# Altium PCB MainPCBRev2.PcbDoc
Units mil, origin at the board's own origin, x right, y up, seen from the top; angles counter-clockwise.
Board outline 3935 x 2755.91 mil, 2 copper layers (Top Layer, Bottom Layer), stack 61.811 mil thick; 29 components, 28 nets, 150 pads, 18 vias.
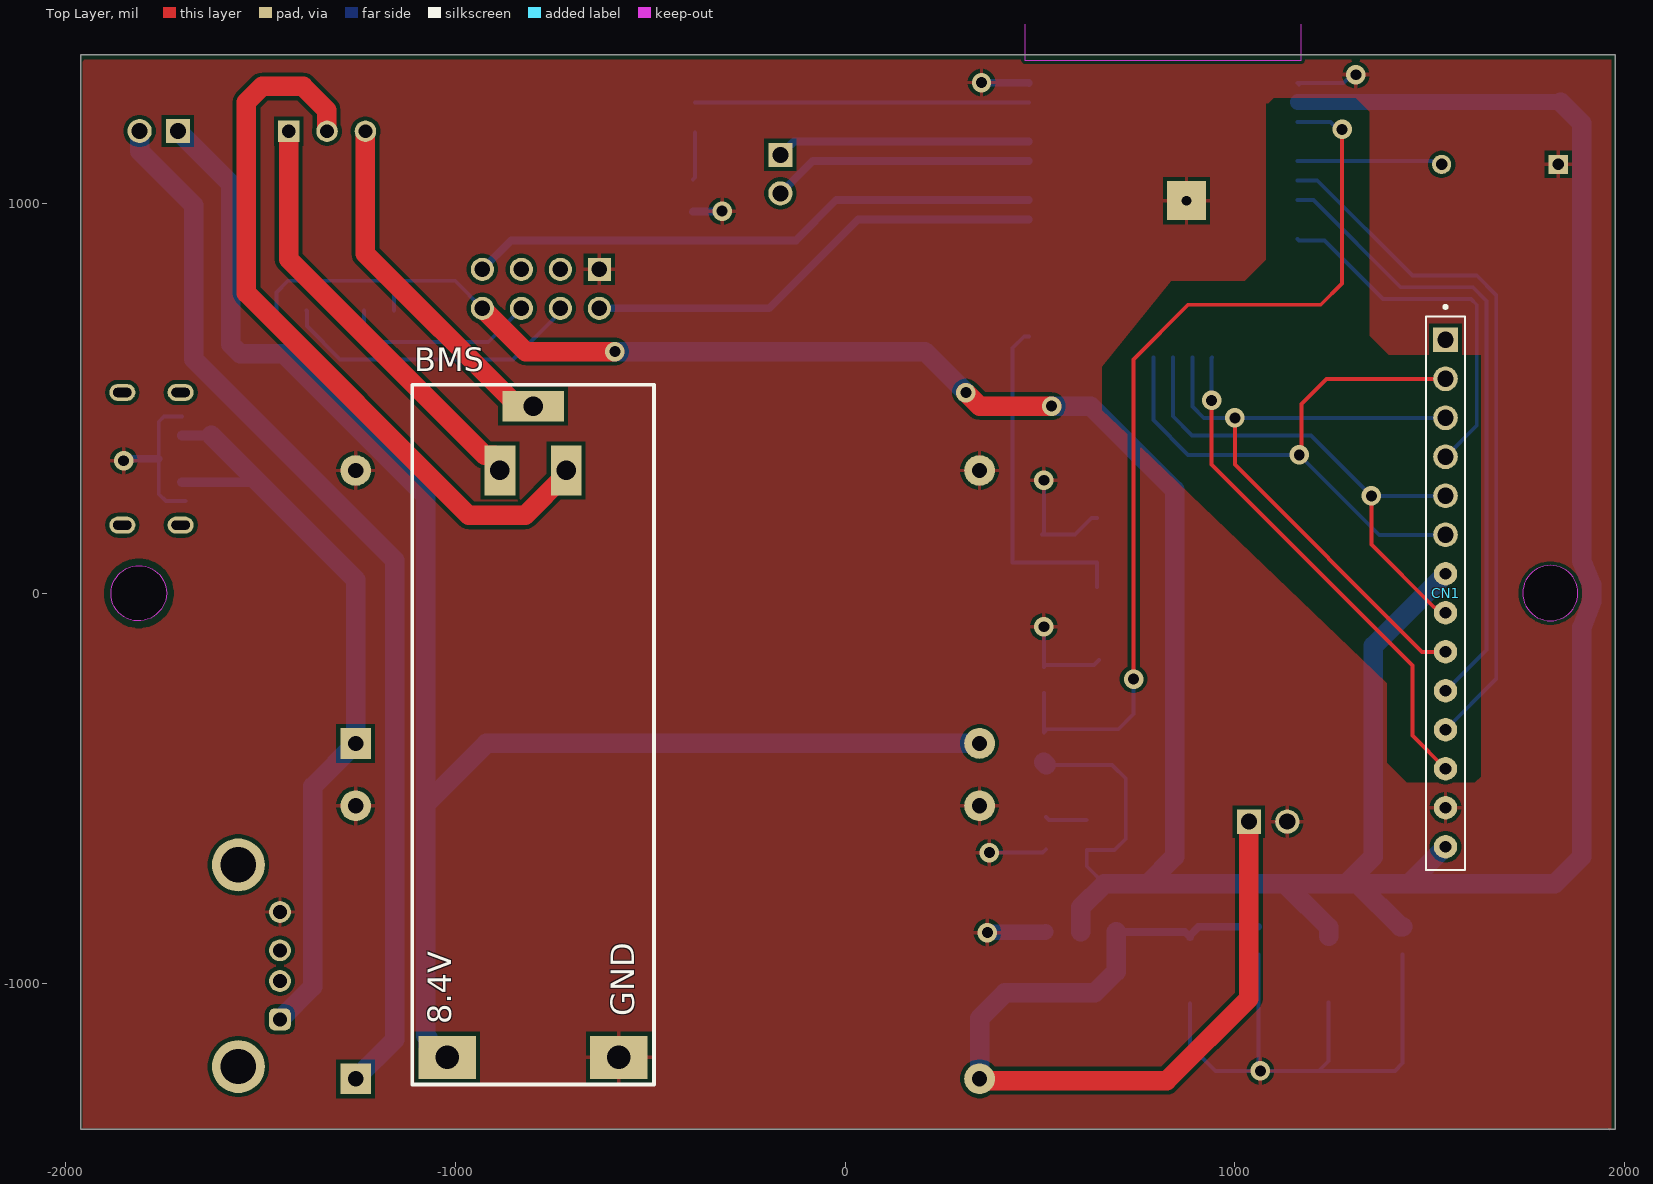
[diagram p0: Top Layer view]
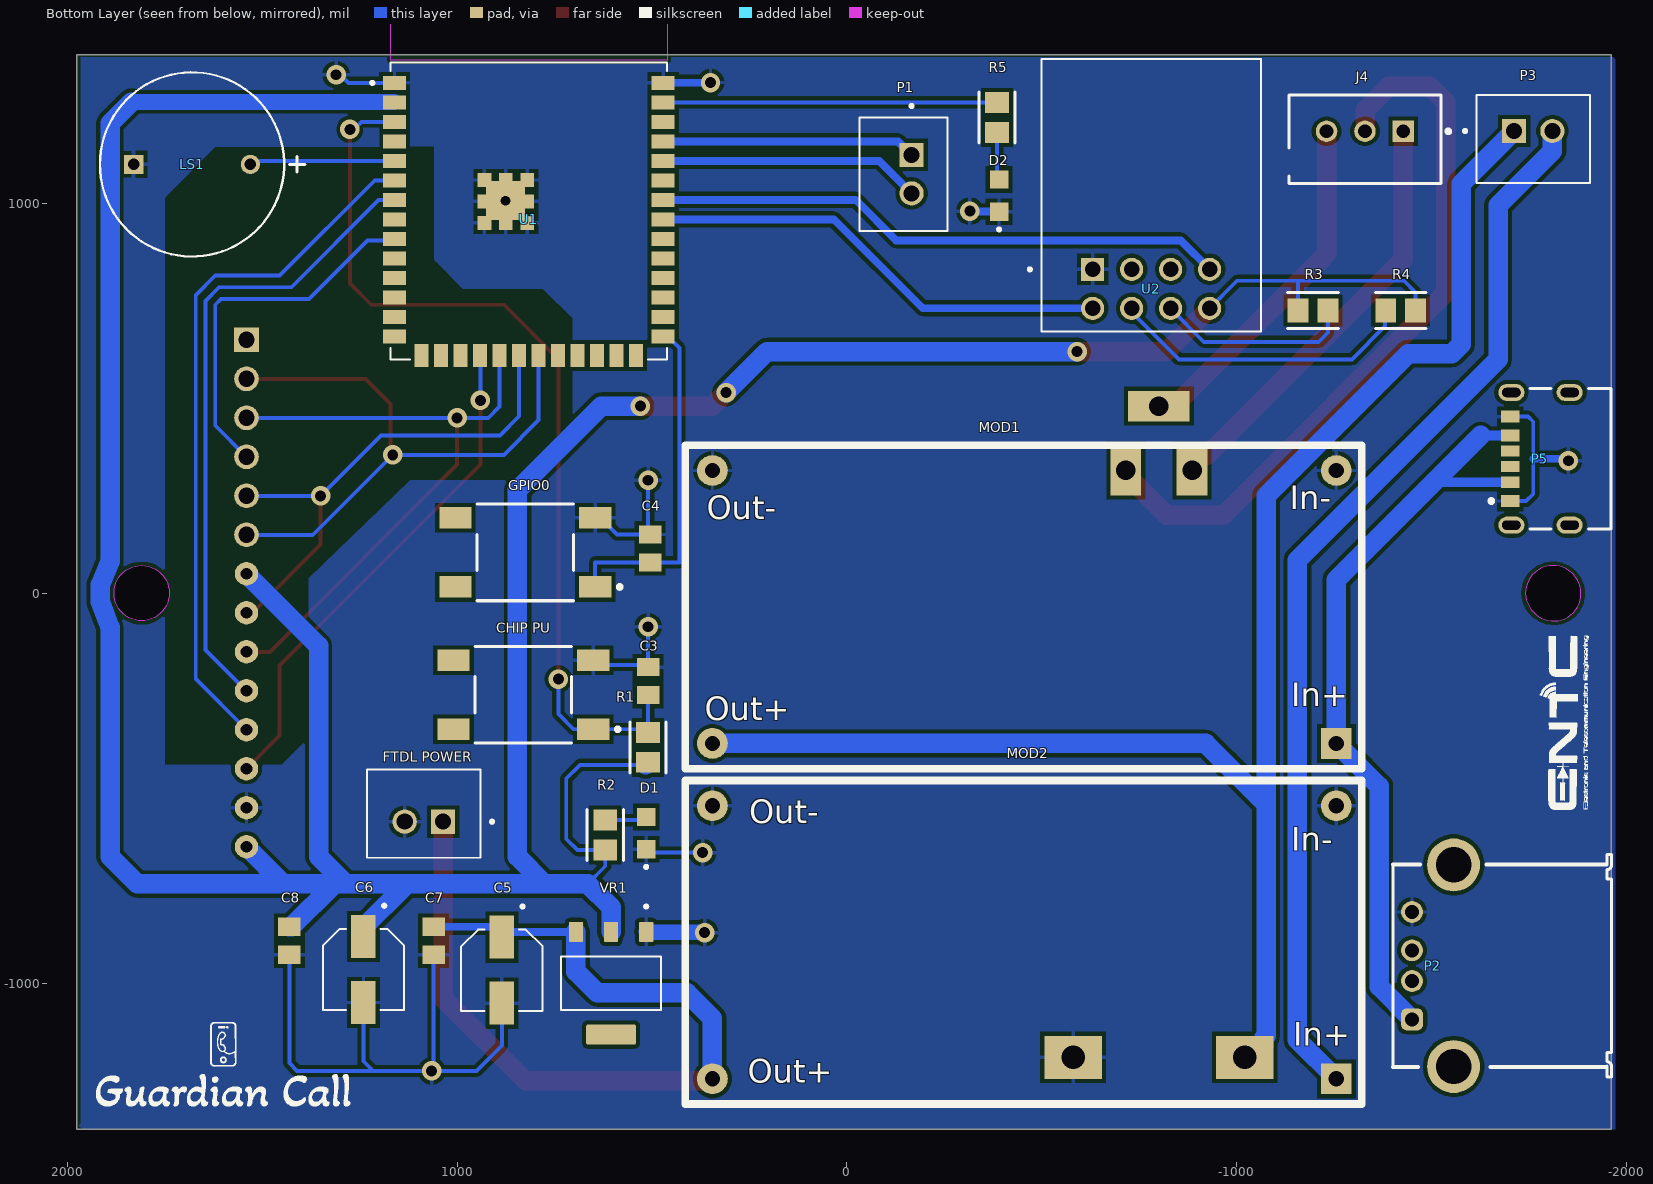
[diagram p1: Bottom Layer view, seen from below]

## Layer stack, top to bottom
Top Solder: solder mask 0.3937, Solder Resist, Dk 3.5
Top Layer: signal copper 1.378
Dielectric 1: dielectric 59.0551, FR-4, Dk 4.8
Bottom Layer: signal copper 1.378
Bottom Solder: solder mask 0.3937, Solder Resist, Dk 3.5

## Board outline
-1960,-1375 -1960,1380.91 1975,1380.91 1975,-1375
cut-out: 1737.96,0.5 ccw(c1808.83,0.5) 1808.83,-70.37 ccw(c1808.83,0.5) 1879.69,0.5 ccw(c1808.83,0.5) 1808.83,71.36 ccw(c1808.83,0.5)
cut-out: -1815.05,-70.91 cw(c-1813.1,-1.96) -1882.04,0 cw(c-1811.02,0) -1811.02,71.02 cw(c-1811.02,0) -1740,0 cw(c-1812.98,2.07)

## Design rules (kind name [scope] priority, off if disabled: settings)
Clearance Clearance_1 [All] p1: gap=10 ignorepadtopadclearanceinfootprint=FALSE except(0: Arc-Hole Track-Hole SMDPad-Hole THPad-Hole Via-Hole Fill-Hole Poly-Hole Region-Hole Text-Hole Hole-Hole)
Clearance [All] p2: gap=10 ignorepadtopadclearanceinfootprint=FALSE ismatrix=TRUE
MinimumSolderMaskSliver [All] p1: minsoldermaskwidth=3.94
PolygonConnect [All] p1: connectstyle=Relief reliefconductorwidth=10 reliefentries=4 polygonreliefangle="90 Angle" airgapwidth=10
RoutingCorners RoutingCornerStyle_1 [All] p1: cornerstyle=45-Degree minsetback=100 maxsetback=100
RoutingCorners [All] p2: cornerstyle=45-Degree minsetback=100 maxsetback=100
RoutingVias [All] p1: holewidth=28 width=50 viastyle="Through Hole" minholewidth=28 minwidth=50 maxholewidth=28 maxwidth=50
SilkToSolderMaskClearance [IsPad] p1: minsilkscreentomaskgap=0 clearancetoexposedcopper=TRUE
SolderMaskExpansion [All] p1: expansion=4 istentingtop=FALSE
Width MaxMinWidth1 [All] p1: maxlimit=50 minlimit=10 preferedwidth=20 minimp=50.000000 maximp=50.000000 favimp=50.000000
Width [All] p2: maxlimit=10 minlimit=10 preferedwidth=10
27 further rules are at their usual default settings.

## Components (designator, comment, footprint, x,y, rotation, side; value= is the part's Value field where it differs from the comment)
BMS "2S BMS" "2S BMS" -800,-365 r90 top
C3 "0.1uF 50V X8L 10%" CAPC2012X145N 510,-225 r270 bottom
C4 "0.1uF 50V X8L 10%" CAPC2012X145N 505,115 r270 bottom
C5 "10uF/50V (20%)" CAP_EEE1EA100SR 885,-966.54 r270 bottom
C6 "10uF/50V (20%)" CAP_EEE1EA100SR 1240,-964.65 r270 bottom
C7 "0.1uF 50V X8L 10%" CAPC2012X145N 1060,-890.83 r90 bottom
C8 "0.1uF 50V X8L 10%" CAPC2012X145N 1430,-890.83 r90 bottom
"CHIP PU" "1571527-2" FP-1571527-2-MFG 830,-260 r270 bottom (schematic designator SW1)
CN1 "Display Headers" "Display Without Cutouts" -20,0 r270 top locked
D1 "LTST-C171TBKT" DIOC200X125X110 515,-615 r90 bottom
D2 "LTST-C171TBKT" DIOC200X125X110 -390,1020 r90 bottom
"FTDL POWER" "FTDL POWER" JST_B2B-XH-A(LF)(SN) 1085,-565 r180 bottom (schematic designator P4)
GPIO0 "1571527-2" FP-1571527-2-MFG 825,105 r270 bottom (schematic designator SW2)
J4 "B3B-XH-AM(LF)(SN)(P)" FP-B3B-XH-AM_LF_SN_P-MFG -1328.43,1164.33 r0 bottom
LS1 "MCKPX-G1203A-K4056" "FP-MCKPX-G1203A-K4056-MFG - duplicate" 1679.61,1100 r180 bottom
MOD1 "DC-DC Boost converter XL6009" "DC-DC boost" -455,-35 r0 bottom
MOD2 "DC-DC Buck converter MP1584 or XL4015" "DC-DC boost" -455,-895 r0 bottom
P1 "TX_RX Header" JST_B2B-XH-A(LF)(SN) -145,1075 r90 bottom
P2 "61400416021" 61400416021 -1685,-955 r90 bottom
P3 "Power Button Connector B2B-XH-A(LF)(SN)" JST_B2B-XH-A(LF)(SN) -1760,1165 r0 bottom
P5 "217175-0001" FP-217175-0001-MFG -1820,345 r90 bottom
R1 "RG2012N-103-B-T5" FP-RG2012-IPC_A 510,-395 r270 bottom
R2 "10kΩ, 0.1%,150V" FP-RG2012-IPC_A 620,-620 r90 bottom
R3 "10kΩ, 0.1%,150V" FP-RG2012-IPC_A -1195,725 r0 bottom
R4 "10kΩ, 0.1%,150V" FP-RG2012-IPC_A -1420,725 r180 bottom
R5 "10kΩ, 0.1%,150V" FP-RG2012-IPC_A -385,1220 r270 bottom
U1 "ESP32-S3_WROOM-1 (N16R8)" XCVR_ESP32-S3-WROOM-1-N16R2 815.83,1101.85 r180 bottom
U2 "2x4 ESP01s" MODULE_ESP-01 -780,1160 r180 bottom
VR1 "AMS1117-3.3" SOT229P700X180-4N 605,-1000 r270 bottom

## Footprints (in the part's own frame and the unit in brackets; to place one, negate y for a bottom-side part, rotate by r counter-clockwise, add the part's x,y. Pads: shape width x height; smd on the part's side, far side on the other; paste and mask are expansions set on the pad)
"2S BMS" [mil]
  rect 110.1x147 hole 60 mask-99999: 1(-825,220)
  rect 110.11x147.48 hole 60 mask-99999: 2(-825,-220)
  rect 127.48x78.74 hole 50 mask-99999: 3(680,85) 4(680,-85)
  rect 78.74x157.48 hole 50 mask-99999: 5(845,0)
  silkscreen extent -895,-310 900,310
61400416021 [mm] "USB 2.0 Type A Horizontal"
  rrect50% 1.42x1.42 hole 0.92: 1(-3.5,5.99)
  round 1.42 hole 0.92: 2(-1,5.99) 3(1,5.99) 4(3.5,5.99)
  round 3.45 hole 2.3: Shell(-6.57,3.28) Shell(6.57,3.28)
  silkscreen extent -7.25,-7 7.25,7.24, body extent -8,-7 8,7, height 7.63
CAP_EEE1EA100SR [mm]
  rect 2.8x1.6 smd: 1(-2.15,0) 2(2.15,0)
  silkscreen extent -4.25,-2.65 2.65,2.65, body extent -3,-2.65 3,2.65, height 5.8
CAPC2012X145N [mm]
  rect 1.19x1.47 smd: 1(-0.91,0) 2(0.91,0)
  body extent -1,-0.63 1,0.63, height 1.45
"DC-DC boost" [mm]
  rect 2x2 hole 1: 1(-20.32,8.89)
  round 2 hole 1: 2(-20.32,-8.89) 3(20.32,8.89) 4(20.32,-8.89)
  silkscreen extent -21.97,-10.54 22.1,10.54
DIOC200X125X110 [mm]
  rect 1.2x1.2 smd: A(1.05,0) C(-1.05,0)
  silkscreen extent -2.3,-0.1 -2.1,0.1, body extent -1,-0.63 1,0.63, height 1.1
"Display Without Cutouts" [mil]
  rect 63.19x63.19 / inner round 63.19 / far side rect 63.19x63.19 hole 42.13: 1(-650,1560)
  round 63.19 hole 42.13: 2(-550,1560) 3(-450,1560) 4(-350,1560) 5(-250,1560) 6(-150,1560)
  round 60 hole 30: 7(-50,1560) 8(50,1560) 9(150,1560) 10(250,1560) 11(350,1560) 12(450,1560) 13(550,1560) 14(650,1560)
  silkscreen extent -739,1510 710,1610, body extent -984,-1610 985,1611, height 650
FP-217175-0001-MFG [mm]
  rrect100% 1.1x1.7 hole 0.6 slot 1.2 at 90 deg paste-2539.97 mask+0: 1(-4.32,2.95) 2(4.32,2.95) 3(-4.32,-0.85) 4(4.32,-0.85)
  rect 0.7x1.2 smd paste+0 mask+0: A5(-0.5,3.03) B5(0.5,3.03)
  rect 0.76x1.2 smd paste+0 mask+0: A9(1.52,3.03) B9(-1.52,3.03)
  rect 0.8x1.2 smd paste+0 mask+0: A12(2.75,3.03) B12(-2.75,3.03)
  silkscreen extent -4.57,-3.55 4.57,4.38, body extent -4.47,-3.45 4.47,3.45, height 3.46
FP-1571527-2-MFG [mm]
  rect 1.4x2.1 smd paste+0 mask+0: 1(-2.25,4.55) 2(-2.25,-4.55) 3(2.25,-4.55) 4(2.25,4.55)
  silkscreen extent -3.15,-3.15 3.15,6.27, body extent -3,-5 3,5, height 4.54
FP-B3B-XH-AM_LF_SN_P-MFG [mm]
  rect 1.4x1.4 hole 0.9 paste-2539.97 mask+0: 1(-2.5,-0.525)
  round 1.4 hole 0.9 paste-2539.97 mask+0: 2(0,-0.525) 3(2.5,-0.525)
  silkscreen extent -5.55,-2.88 4.95,2.88, body extent -4.95,-2.88 4.95,2.88, height 7
"FP-MCKPX-G1203A-K4056-MFG - duplicate" [mm]
  round 1.25 hole 0.75 paste-2539.97 mask+0: +(3.8,0)
  rect 1.25x1.25 hole 0.75 paste-2539.97 mask+0: -(-3.8,0)
  silkscreen extent -6,-6 7.35,6, body extent -6,-6 6.38,6, height 9.5
FP-RG2012-IPC_A [mil]
  rect 53.34x61.27 smd paste+0 mask+0: 1(-38.41,0) 2(38.41,0)
  silkscreen extent -65,-46 65,46, body extent -39,-25 39,25, height 20
JST_B2B-XH-A(LF)(SN) [mm]
  rect 1.575x1.575 / inner round 1.575 / far side rect 1.575x1.575 hole 1.05: 1(1.25,-0.525)
  round 1.575 hole 1.05: 2(-1.25,-0.525)
  silkscreen extent -3.7,-2.88 4.54,2.88, body extent -3.7,-2.88 3.7,2.88, height 7
MODULE_ESP-01 [mm]
  rect 1.508x1.508 / inner round 1.508 / far side rect 1.508x1.508 hole 1: 1(-3.81,-8.36)
  round 1.508 hole 1: 2(-1.27,-8.36) 3(1.27,-8.36) 4(3.81,-8.36) 5(-3.81,-10.9) 6(-1.27,-10.9) 7(1.27,-10.9) 8(3.81,-10.9)
  silkscreen extent -8,-12.4 7.15,5.33, body extent -7.2,-12.35 7.2,12.35, height 6.5
SOT229P700X180-4N [mm]
  rrect15% 1.31x0.93 smd: 1(-3.345,2.29) 2(-3.345,0) 3(-3.345,-2.29)
  rrect15% 1.31x3.24 smd: 4(3.345,0)
  silkscreen extent -5.1,-3.25 1.75,3.25, body extent -3.5,-3.25 3.5,3.25, height 1.8
XCVR_ESP32-S3-WROOM-1-N16R2 [mm]
  rect 1.5x0.9 smd: 1(-8.75,5.26) 2(-8.75,3.99) 3(-8.75,2.72) 4(-8.75,1.45) 5(-8.75,0.18) 6(-8.75,-1.09) 7(-8.75,-2.36) 8(-8.75,-3.63) 9(-8.75,-4.9) 10(-8.75,-6.17) 11(-8.75,-7.44) 12(-8.75,-8.71) 13(-8.75,-9.98) 14(-8.75,-11.25) 27(8.75,-11.25) 28(8.75,-9.98) 29(8.75,-8.71) 30(8.75,-7.44) 31(8.75,-6.17) 32(8.75,-4.9) 33(8.75,-3.63) 34(8.75,-2.36) 35(8.75,-1.09) 36(8.75,0.18) 37(8.75,1.45) 38(8.75,2.72) 39(8.75,3.99) 40(8.75,5.26)
  rect 0.9x1.5 smd: 15(-6.985,-12.5) 16(-5.715,-12.5) 17(-4.445,-12.5) 18(-3.175,-12.5) 19(-1.905,-12.5) 20(-0.635,-12.5) 21(0.635,-12.5) 22(1.905,-12.5) 23(3.175,-12.5) 24(4.445,-12.5) 25(5.715,-12.5) 26(6.985,-12.5)
  rect 0.9x0.9 smd: 41(-2.9,-3.86) 41(-2.9,-2.46) 41(-2.9,-1.06) 41(-1.5,-3.86) 41(-1.5,-2.46) 41(-1.5,-1.06) 41(-0.1,-3.86) 41(-0.1,-2.46) 41(-0.1,-1.06)
  rect 2.54x2.54 hole 0.635: 41(-1.524,-2.413)
  Keep-Out Layer region: 9,6.75 -9,6.75 -9,12.75 9,12.75
  Keep-Out Layer region: 9,6.75 -9,6.75 -9,12.75 9,12.75
  silkscreen extent -10.3,-12.75 9,6.6, body extent -9,-12.88 9,12.62, height 3.25

## Part data
C3 C4 C7 C8: library part "0.1uF 50GCJ21BL81H104KA01LV X8L 10%", "Cap Ceramic 0.1uF 50V X8L 10% Pad SMD 0805 Soft Termination 150C Automotive T/R", Package="2012 Murata", Check_prices=https://www.snapeda.com/parts/GCJ21BL81H104KA01L/Murata+Electronics+North+America/view-part/?ref=eda, MF=Murata, MP=GCJ21BL81H104KA01L, SnapEDA_Link=https://www.snapeda.com/parts/GCJ21BL81H104KA01L/Murata+Electronics+North+America/view-part/?ref=snap
C5 C6: "Capacitor 10uF/50V (20%) SMD Electrolytic 5*5.4"
"CHIP PU" GPIO0: library part "SWITCH TACTILE SPST-NO 0.05A 24V", "SWITCH TACTILE SPST-NO 0.05A 24V", Case/Package=SMD/SMT, Current Rating=50mA, Max Operating Temperature=85°C, Min Operating Temperature=-35°C, Operating Force=100gf, Package Quantity=1, Voltage Rating (DC)=24V, Actuator Length=0.7mm, Actuator Material=Polyphenylene, Actuator Type=Standard, Contact Material="Copper Alloy", Contact Plating=Silver, Depth=10mm, ELV=Compliant, Height=4.3mm, Illumination Type=Non-Illuminated, Length=6mm, Material=Polyamide, Max Current Rating=50mA, Mechanical Life=200000Cycles, Mount="Surface Mount", Orientation=Straight, Packaging="Tape and Reel", REACH SVHC="No SVHC", RoHS Compliant=Yes, Series="FSMJSML, Alcoswitch", Switch Function=Off-Mom, Switch Travel=0.25mm, Termination="Gull Wing", Throw Configuration=SPST, Type=Switch
CN1: library part "TFT-LCD-2.8'' Display Headers"
D1 D2: "Blue 470nm LED Indication - Discrete 3.3V 0805 (2012 Metric)", Package="0805 Lite-On", Check_prices=https://www.snapeda.com/parts/LTST-C171TBKT/Lite-On+Inc./view-part/?ref=eda, MF="Lite-On Inc.", MP=LTST-C171TBKT, SnapEDA_Link=https://www.snapeda.com/parts/LTST-C171TBKT/Lite-On+Inc./view-part/?ref=snap
"FTDL POWER" P3: library part B2B-XH-A(LF)(SN), "Connector Header Through Hole 2 position 0.098 (2.50mm)", Package=None, Check_prices=https://www.snapeda.com/parts/B2B-XH-A(LF)(SN)/JST+Sales+America+Inc./view-part/?ref=eda, MF="JST Sales America Inc.", MP=B2B-XH-A(LF)(SN), SnapEDA_Link=https://www.snapeda.com/parts/B2B-XH-A(LF)(SN)/JST+Sales+America+Inc./view-part/?ref=snap
J4: library part JST-XH-3pin, "CONN HEADER VERT 3POS 2.5MM", Color=Natural, Package Quantity=1000, Connector Type="Male Pin", Contact Plating=Tin, Contact Type="Male Pin", Mount="Through Hole", Number of Positions=3, Number of Rows=1, Packaging=Bulk, Pitch=0.098inch, Series=XH, Termination=Press-Fit
LS1: "MAGNETIC BUZZER AND TRANSDUCER - More Details", Current=30mA, Frequency=2300Hz, Manufacturer="Multicomp Pro", Max Supply Voltage=5V, Min Supply Voltage=2V, Operating Supply Voltage=3V, Package=0, Temperature="-20°C to +70°C", Temperature Range High=+70°C, Temperature Range Low=-20°C, Automotive=No, Category=Speak, ComponentLink2Description=Datasheet, ComponentLink2URL=http://www.farnell.com/datasheets/1498149.pdf?_ga=2.17855225.1157923166.1572356775-536200964.1569240579, Device Class L1=Electromechanical, Device Class L2="Audio Products", Device Class L3=Buzzers, Height=9.5mm, Lead Free=Yes, Manufacturer Part Number=MCKPX-G1203A-K4056, Octopart=https://octopart.com/mckpx-g1203a-k4056-multicomp-12157154, RoHS=TRUE, Standoff Height=0.5mm
P2: library part "Type-A USB", Color=White, Contact Resistance=20mΩ, Current Rating=1.5A, Flammability Rating="UL94 V-0", Insulation Resistance=1GΩ, Max Operating Temperature=105°C, Min Operating Temperature=-40°C, Operating Supply Voltage=30V, Connector Type=USB, Contact Material=Copper, Contact Plating=Gold, Gender=Receptacle, Insulation Material=PBT, Lead Free="Lead Free", Length=15.8mm, Mount="Horizontal, Through Hole", NexarPartId=21041530, Number of Contacts=4, Number of Pins=4, Number of Ports=1, Number of Positions=4, Orientation=Horizontal, REACH SVHC=Unknown, RoHS=Compliant, Termination=Solder, USB Standard="USB 2.0", Voltage Rating=30V, Voltage Rating (DC)=30V, Width=14.4mm
P5: library part "Type C USB", "CONN RCP USB2.0 C 6+18P SMD RA"
R1: "Automotive Metal Thin Film Chip Resistor, 0805, 10kΩ, 0.1%, 10ppm/°C, 0.125W, 150V", Case Code (Imperial)=0805, Case Code (Metric)=2012, Max Operating Temperature=155°C, Max Power Dissipation=125mW, Min Operating Temperature=-55°C, Package Quantity=5000, Power Rating=100mW, Resistance=10kR, Resistor Type="Thin Film", Temperature Coefficient=10ppm/°C, Tolerance=0.1%, Voltage Rating=100V, Voltage Rating (DC)=150V, Case/Package=0805, Features="Automotive AEC-Q200", Height=0.02inch, Lead Free="Lead Free", Length=0.079inch, Number of Terminations=2, Packaging="Tape and Reel", RoHS Compliant=Yes, Series=RG, Size Code=0805, Termination=SMD/SMT, Width=0.049inch
R2 R3 R4 R5: library part RG2012N-103-B-T5, "Automotive Metal Thin Film Chip Resistor, 0805, 10kΩ, 0.1%, 10ppm/°C, 0.125W, 150V", Case Code (Imperial)=0805, Case Code (Metric)=2012, Max Operating Temperature=155°C, Max Power Dissipation=125mW, Min Operating Temperature=-55°C, Package Quantity=5000, Power Rating=100mW, Resistance=10kR, Resistor Type="Thin Film", Temperature Coefficient=10ppm/°C, Tolerance=0.1%, Voltage Rating=100V, Voltage Rating (DC)=150V, Case/Package=0805, Features="Automotive AEC-Q200", Height=0.02inch, Lead Free="Lead Free", Length=0.079inch, Number of Terminations=2, Packaging="Tape and Reel", RoHS Compliant=Yes, Series=RG, Size Code=0805, Termination=SMD/SMT, Width=0.049inch
U1: library part ESP32-S3-WROOM-1-N16R8, "Multiprotocol Modules SMD Module, ESP32-S3R8, 3.3V, 8 MB Octal PSRAM Die, 16 MB Quad SPI Flash, PCB Antenna", Supplier Part Number 1=1965-ESP32-S3-WROOM-1-N16R8CT-ND, Supplier 1=Digikey
VR1: "Sot223/Pkg 1-Amp 3.3-Volt Low Drop Out Voltage Regulatator", Package="SOT-223 Seeed Technology", Availability="Not in stock", Check_prices=https://www.snapeda.com/parts/AMS1117-3.3/Advanced+Monolithic+Systems/view-part/?ref=eda, MF="Advanced Monolithic Systems", MP=AMS1117-3.3, Price=None, SnapEDA_Link=https://www.snapeda.com/parts/AMS1117-3.3/Advanced+Monolithic+Systems/view-part/?ref=snap

## Via types
v1: diameter 50, hole 28, Top Layer to Bottom Layer, 18 vias

## Nets (pads, with @x,y where several pads share a name; then routed paths per layer and width w, separated by ;. In a path a pad name is that pad's centre, name@x,y a point inside that pad or via, vN(x,y) a via of type N, cw(c..) or ccw(c..) an arc to the next point about the centre after c; other vN are vias at no path point)
BATTERY_VCC: BMS.1 MOD1.3 P3.1 | length 4222.2
  Bottom Layer w50: P3.1 -1575,1049.88 -1575,638.43 -1551.57,615 -1440,615 -1075,250 -1075,-540 ; BMS.1 -1038.45,-1190 -1068.5,-1159.95 -1068.5,-1141.5 -1075,-1135 -1075,-540 ; MOD1.3 -920,-385 -1075,-540
BUCK_VCC: "FTDL POWER.1" C5.1 C7.2 MOD2.3 VR1.3 | length 2274.9
  Top Layer w50: MOD2.3 350,-1250 825,-1250 1035.79,-1039.21 1035.79,-585.67
  Bottom Layer w20: VR1.3 871.42,-868.31 C5.1 885,-876.5 906.5,-855 C7.2
  Bottom Layer w40: VR1.3@695,-868.46 VR1.3
  Bottom Layer w50: MOD2.3 345,-1090 410,-1025 640,-1025 695,-970 VR1.3@695,-868.46
buzzer: LS1.+ U1.5 | length 351.7
  Bottom Layer w10: U1.5 1506.46,1108.94 LS1.+@1510.39,1105
chip_pu: "CHIP PU.4" C3.2 R1.1 U1.3 | length 2394.2
  Top Layer w10: v1(740,-220) 740,600 880,740 1220,740 1275,795 v1(1275,1190)
  Bottom Layer w10: C3.2@510,-255 R1.1 518.01,-348.58 650.87,-348.58 701.42,-348.58 740,-310 v1(740,-220) ; U1.3 1245.24,1208.94 1264.18,1190 v1(1275,1190)
disp_CLK: CN1.5 CN1.8 U1.20 | length 1321.6
  Top Layer w10: v1(1350,250) 1350,125 1510.68,-35.68 1512.15,-35.68 1526.47,-50 CN1.8
  Bottom Layer w10: U1.20@840.94,604.61 840.94,454.06 890,405 1195,405 v1(1350,250) CN1.5
disp_CS: CN1.12 U1.18 | length 1303.5
  Top Layer w10: v1(940,495) 940,330 1455,-185 1455,-365 CN1.12
  Bottom Layer w10: v1(940,495) 940,603.66 U1.18@940.94,604.61
disp_D/C: CN1.10 U1.7 | length 1635.4
  Bottom Layer w10: U1.7 1201.06,1008.94 1425,785 1610,785 1645,750 1645,-145 CN1.10
disp_MISO: CN1.2 CN1.6 U1.21 | length 1560.4
  Top Layer w10: v1(1165,355) 1170.78,360.78 1170.78,485.78 1235,550 CN1.2
  Bottom Layer w10: U1.21@790.94,604.61 790.94,444.06 880,355 v1(1165,355) 1370,150 CN1.6
disp_MOSI: CN1.3 CN1.9 U1.19 | length 1645.5
  Top Layer w10: v1(1000,450) 1000,330 1480,-150 CN1.9
  Bottom Layer w10: U1.19@890.94,604.61 890.94,479.06 920,450 v1(1000,450) CN1.3
disp_RESET: CN1.11 U1.6 | length 1800.3
  Bottom Layer w10: U1.6 1211.06,1058.94 1455,815 1620,815 1670,765 1670,-220 CN1.11
disp_T_CS: CN1.4 U1.9 | length 952.8
  Bottom Layer w10: U1.9 1164.25,905 1230,905 1380,755 1605,755 1620,740 1620,430 CN1.4
GND: "CHIP PU.1" "FTDL POWER.2" BMS.2 C3.1 C4.1 C5.2 C6.2 C7.1 C8.1 CN1.13 D1.C D2.C GPIO0.1 LS1.- MOD1.2 MOD1.4 MOD2.2 MOD2.4 P2.4 P5.A12 P5.B12 U1.1 U1.40 U1.41 U2.1 VR1.1 | length 3121.3
  Top Layer w35: MOD1.4@335,305 345,305 MOD1.4
  Bottom Layer w10: P5.A12 -1746.73,453.27 -1760,440 -1760,345 -1760,255 -1741.73,236.73 P5.B12@-1690.71,236.73 ; P2.4 P2.4@-1447.09,-815.12 ; MOD1.2@-1257.5,315 MOD1.2 ; MOD2.2 MOD2.2@-1252.5,-547.5 ; v1@370,-670 v1(370,-665) 506.34,-665 D1.C ; C3.1 v1(510,-85.83) ; C3.1@510,-183.35 638.94,-183.35 650.87,-171.42 ; v1(510,290) 510,155.83 C4.1 589.33,150.83 632.09,193.58 GPIO0.1 ; C5.2 885,-1160 950,-1225 v1(1065,-1225) ; v1@1057.07,-1222.07 1062.07,-1222.07 v1(1065,-1225) ; v1@1060,-1219.14 C7.1 ; U1.1@1164.25,1305 U1.1 1278.11,1308.94 1299.18,1330 v1(1310,1330) ; C6.2 1240,-1200 1215,-1225 ; C8.1 1430,-1205 1410,-1225 1215,-1225 ; v1(1065,-1225) 1215,-1225
  Bottom Layer w20: v1(-1850,340) -1845,345 -1760,345 ; U2.1 U2.1@-627.07,827.93 ; D2.C -389.33,979.33 -315.67,979.33 v1(-315,980) ; v1(350,1310) 350.53,1309.47 470.81,1309.47 U1.40
  Bottom Layer w40: v1(365,-870) 365.85,-869.15 514,-869.15 VR1.1
GPIO_0: C4.2 GPIO0.4 U1.27 | length 882.4
  Bottom Layer w10: U1.27 459.53,658.94 430,629.41 430,79.17 C4.2 645.87,79.17 GPIO0.4
NetBMS_3: BMS.3 J4.1 | length 1108.7
  Top Layer w50: J4.1 -1426.85,856.85 -923.74,353.74 -899.37,353.74 -885,339.37 BMS.3
NetBMS_4: BMS.4 J4.2 | length 1916.3
  Top Layer w50: J4.2 -1329.4,1185.98 -1329.4,1239.4 -1390,1300 -1495,1300 -1535,1260 -1535,770 -965,200 -820.63,200 -715,305.63 BMS.4@-715,330
NetBMS_5: BMS.5 J4.3 | length 905.3
  Top Layer w50: J4.3@-1230,1184.09 -1230,870.63 -839.37,480 BMS.5
NetD1_A: D1.A R2.2 | length 108.3
  Bottom Layer w10: D1.A 522.93,-581.59 R2.2
NetD2_A: D2.A R5.2 | length 122.3
  Bottom Layer w10: D2.A -385,1066.34 R5.2
NetMOD2_1: MOD2.1 P3.2 | length 2743.1
  Bottom Layer w50: P3.2 -1809.21,1134.21 -1670,995 -1670,600 -1155,85 -1155,-1145 MOD2.1
NetR3_1: R3.1 U2.7 | length 505.8
  Bottom Layer w10: R3.1 -1233.41,668.41 -1210,645 -915,645 U2.7@-830,730
  Bottom Layer w20: U2.7@-830,730 U2.7
NetR4_1: R4.1 U2.6 | length 785.4
  Bottom Layer w10: R4.1 -1380.22,723.64 -1380.22,685.22 -1295,600 -851.72,600 U2.6@-730,721.72
  Bottom Layer w20: U2.6@-730,721.72 U2.6
NetR5_1: R5.1 U1.39 | length 856.6
  Bottom Layer w10: R5.1 -384.47,1258.94 U1.39
RX_esp01s: U1.34 U2.4 | length 1475.1
  Bottom Layer w20: U2.4 -855.87,905 -126.06,905 -22.13,1008.94 U1.34
RX_esp32: P1.2 U1.36 | length 671.4
  Bottom Layer w20: P1.2 -82.52,1108.94 U1.36
TX_esp01s: U1.33 U2.5 | length 1195.8
  Bottom Layer w20: U2.5 -194.13,730.87 33.94,958.94 U1.33
TX_esp32: P1.1 U1.37 | length 651.4
  Bottom Layer w20: P1.1 -130.94,1158.94 U1.37
VBUS_5V: MOD1.1 P2.1 P5.A9 P5.B9 | length 2002.7
  Bottom Layer w25: P5.B9 -1505.16,285.16 ; P5.A9 -1624.84,404.84
  Bottom Layer w50: -1624.84,404.84 -1505.16,285.16 -1255,35 MOD1.1 -1365,-495 -1365,-1008.62 P2.1
VCC_3V3: C6.1 C8.2 CN1.7 CN1.14 R1.2 R2.1 R3.2 R4.2 U1.2 U2.8 VR1.2 | length 9717.8
  Top Layer w30: U2.8 U2.8@-925.87,730.87
  Top Layer w50: U2.8 -819.13,620 v1(-590,620) ; v1(310,515) 345,480 v1(530,480)
  Bottom Layer w10: R4.2 -1458.41,771.59 -1428.41,801.59 -1000.72,801.59 U2.8 ; R3.2 -1156.59,798.41 ; R1.2@516.59,-440 685,-440 720,-475 720,-630 691.59,-658.41 R2.1 620,-700 665,-745
  Bottom Layer w40: U1.2@1161.38,1260 1835,1260
  Bottom Layer w50: v1(-590,620) 205,620 v1(310,515) ; R1.2 R1.2@516.59,-440 ; v1(530,480) 630,480 845,265 845,-675 775,-745 ; VR1.2 605,-805 665,-745 775,-745 ; C6.1 1240,-856.38 1135,-751.38 1135,-745 ; C8.2 1424.49,-855 1314.49,-745 ; CN1.14 1445,-745 ; CN1.7 1355,-135 1355,-675.16 1285.16,-745 ; 1835,1260 1890,1205 1890,102.59 1890,81.88 1914.69,21.97 1914.69,-20.98 1890,-87.61 1890,-675 1820,-745 1445,-745 ; 775,-745 1135,-745 ; 1135,-745 1285.16,-745 ; 1285.16,-745 1314.49,-745 ; 1314.49,-745 1445,-745
pads on no net: "CHIP PU.2" "CHIP PU.3" CN1.1 GPIO0.2 GPIO0.3 P2.2 P2.3 P2.Shell P5.1 P5.2 P5.3 P5.4 P5.A5 P5.B5 U1.4 U1.8 U1.10 U1.11 U1.12 U1.13 U1.14 U1.15 U1.16 U1.17 U1.22 U1.23 U1.24 U1.25 U1.26 U1.28 U1.29 U1.30 U1.31 U1.32 U1.35 U1.38 U2.2 U2.3 VR1.4

## Polygon pours and split planes (outlines as drawn)
GND on Top Layer "GND Copper" (solid, remove dead copper, pour order 0): -1955.47,1369.58 -1954.3,1368.41 1965,1368.41 1965,-1381.59 1955,-1371.59 -1955,-1371.59
GND on Bottom Layer "GND Copper Bottom" (solid, remove dead copper, pour order 1): -1965,1375 -1970,1370 -1970,-1375 1960,-1375 1970,-1365 1965,-1360 1965,1375

## Other copper
Top Layer:
  pour cut-out: 1310,1270 1345,1235 1345,660 1395,610 1630,610 1630,-405 1630,-470 1615,-485 1440,-485 1390,-435 1390,-230 660,470 660,581.03 836.39,800 1025,800 1080,855 1080,1255 1085,1255 1100,1270 1215,1270
Bottom Layer:
  pour cut-out: 1060,1145 1620,1145 1750,1015 1750,-440 1450,-440 1380,-370 1380,38.81 1120,290 840,290 840,295 705,430 705,705 780,780 985,780 1060,855

## Silkscreen, mask and mechanical layers (free items; w line width, h text height)
Bottom Overlay:
  drawing of 56 lines, arcs and shapes, not listed
Mechanical 1:
  the board outline again, w20

## Text inside footprints (layer, text, board x,y; h text height)
BMS: Top Overlay "GND" at -540,-1085 h60 r90; Top Overlay "8.4V" at -1010,-1105 h60 r90
MOD1: Bottom Overlay "In+" at -1140,-290 h60; Bottom Overlay "In-" at -1135,215 h60; Bottom Overlay "Out-" at 360,190 h60; Bottom Overlay "Out+" at 365,-325 h60
MOD2: Bottom Overlay "Out-" at 250,-590 h60; Bottom Overlay "Out+" at 255,-1255 h60; Bottom Overlay "In-" at -1140,-660 h60; Bottom Overlay "In+" at -1145,-1160 h60
U1: Mechanical 13 "ANTENNA" at 992.99,1475.87 h50